# Altium PCB PCB_Project_1.PcbDoc
Units mil, origin at the board's own origin, x right, y up, seen from the top; angles counter-clockwise.
Board outline 6000 x 4000 mil, 2 copper layers (Top Layer, Bottom Layer); 5 components, 0 nets, 34 pads, 8 vias.
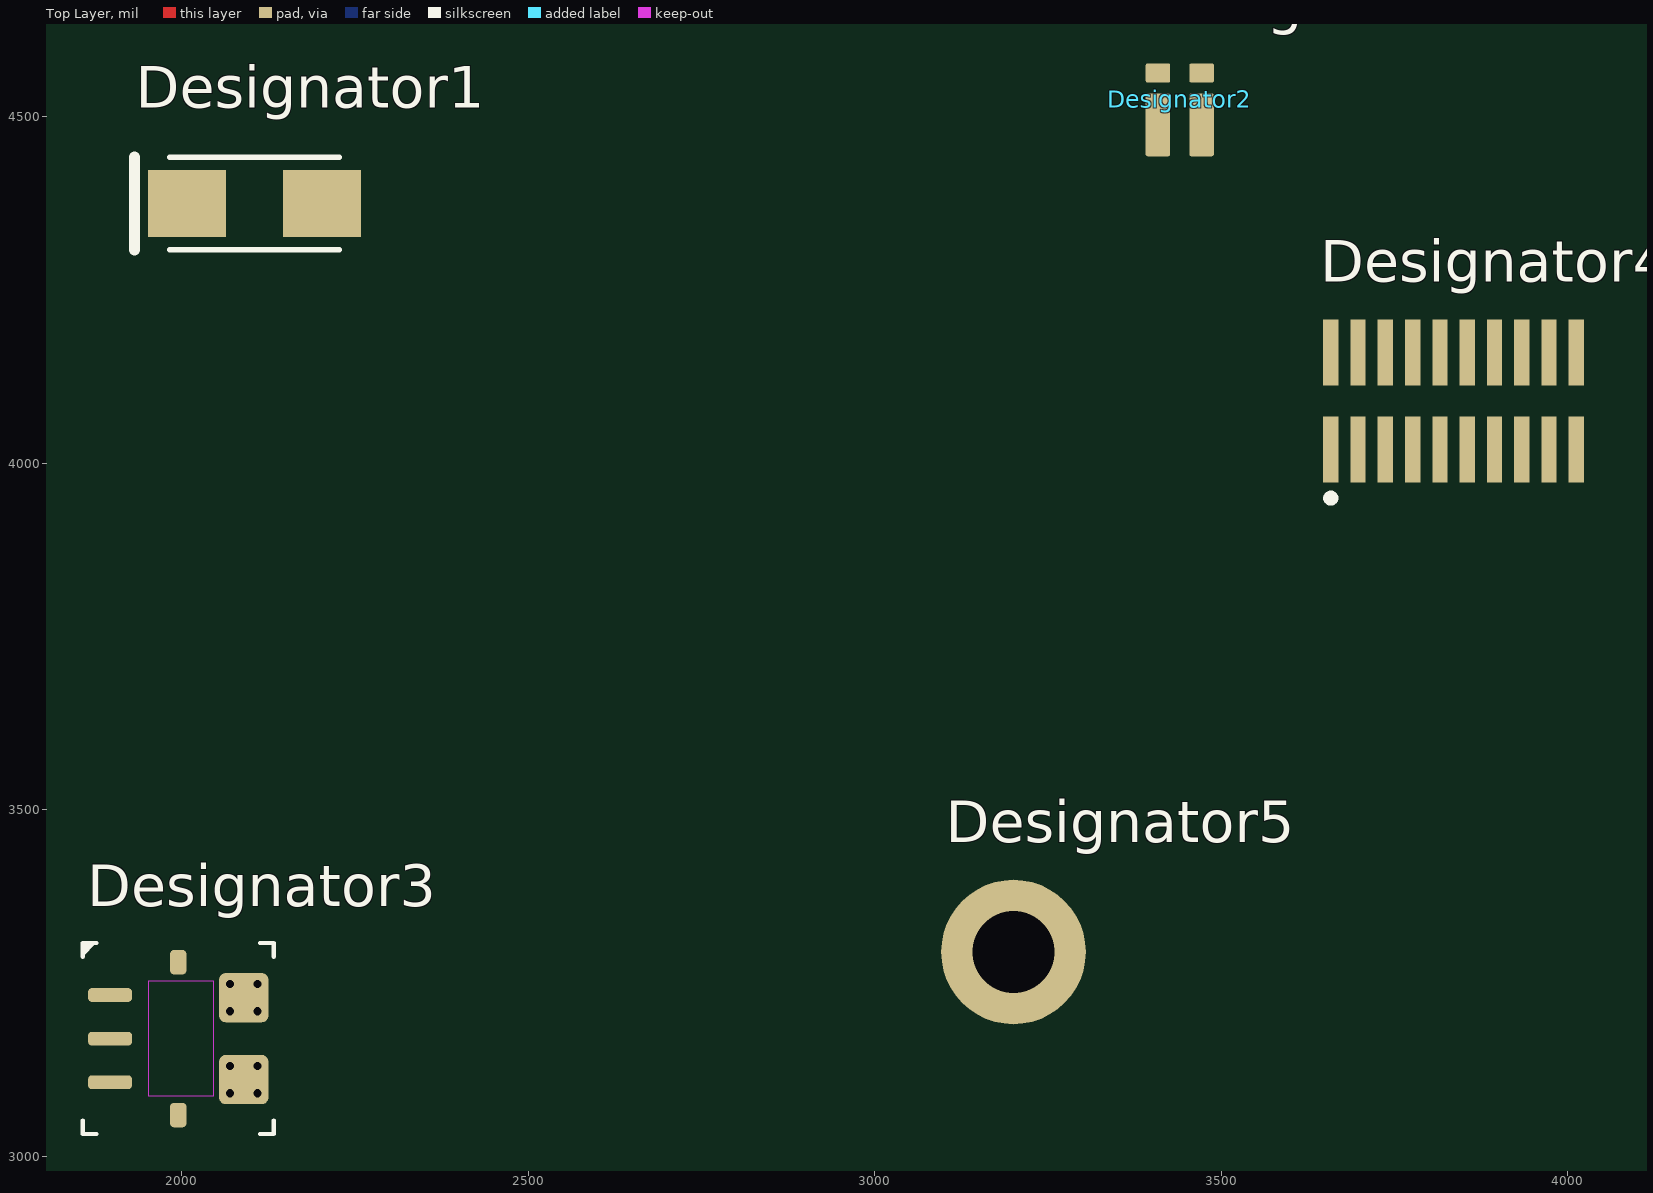
[diagram p0: Top Layer view]
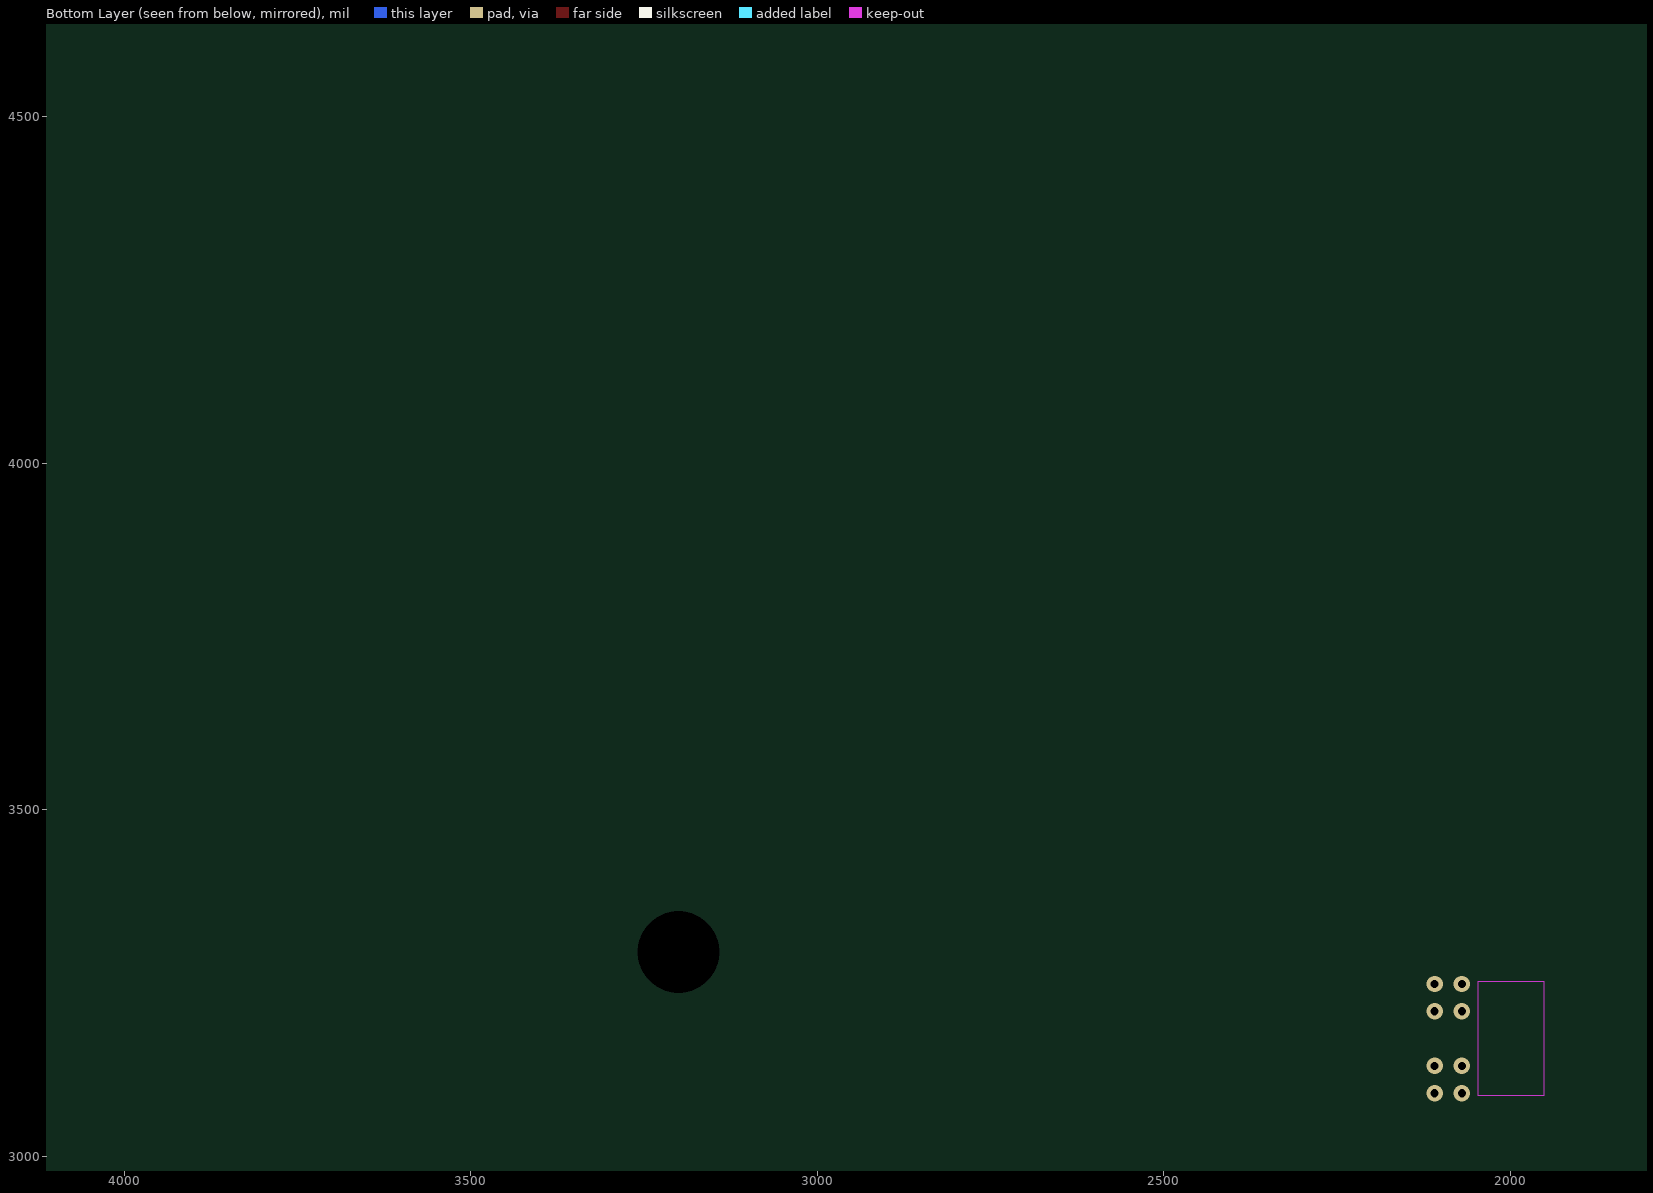
[diagram p1: Bottom Layer view, seen from below]

## Layer stack, top to bottom
Top Solder: solder mask 0.4, Solder Resist, Dk 3.5
Top Layer: signal copper 1.4
Dielectric 1: dielectric 12.6, FR-4, Dk 4.8
Bottom Layer: signal copper 1.4
Bottom Solder: solder mask 0.4, Solder Resist, Dk 3.5

## Board outline
1000,1000 7000,1000 7000,5000 1000,5000

## Design rules (kind name [scope] priority, off if disabled: settings)
Clearance [All] p1: gap=10 ignorepadtopadclearanceinfootprint=FALSE except(0: Arc-Hole Track-Hole SMDPad-Hole THPad-Hole Via-Hole Fill-Hole Poly-Hole Region-Hole Text-Hole)
PolygonConnect [All] p1: connectstyle=Relief reliefconductorwidth=10 reliefentries=4 polygonreliefangle="90 Angle" airgapwidth=10
RoutingVias [All] p1: holewidth=28 width=50 viastyle="Through Hole" minholewidth=28 minwidth=50 maxholewidth=28 maxwidth=50
SolderMaskExpansion [All] p1: expansion=4 istentingtop=FALSE
Width [All] p1: maxlimit=10 minlimit=10 preferedwidth=10
30 further rules are at their usual default settings.

## Components (designator, comment, footprint, x,y, rotation, side; value= is the part's Value field where it differs from the comment)
Designator1 "Comment" AVX-TAJ-C-2_M 2105,4375 r0 top
Designator2 "Comment" SUSUMU-3216T4A 3440,4510 r0 top
Designator3 "Comment" ALEG-PSOF-7_V 1995,3170 r0 top
Designator4 "Comment" SMTC-MW-10-03-G-D-245-065-P_V 3835,4090 r0 top
Designator5 "Comment" WE-9774040243_V 3200,3295 r0 top

## Footprints (in the part's own frame and the unit in brackets; to place one, negate y for a bottom-side part, rotate by r counter-clockwise, add the part's x,y. Pads: shape width x height; smd on the part's side, far side on the other; paste and mask are expansions set on the pad)
ALEG-PSOF-7_V [mm] "SOF, 8-Leads, Body 4.8x6.4mm"
  rrect50% 1.6x0.5 smd: 1(-2.5,1.6) 2(-2.5,0) 3(-2.5,-1.6)
  rrect50% 0.6x0.9 smd: 4(0,-2.8) 7(0,2.8)
  rrect25% 1.8x1.8 smd: 5(2.4,-1.5) 6(2.4,1.5)
  Keep-Out Layer region: -1.1,-2.1 1.3,-2.1 1.3,2.1 -1.1,2.1
  silkscreen extent -3.5,-3.5 3.5,3.5, body extent -3.2,-3.2 3.2,3.2, height 1.49
AVX-TAJ-C-2_M [mm] "Molded Capacitor, 2-Leads, Body 6.2x3.4mm, IPC Low Density"
  rect 2.85x2.45 smd: 1(-2.475,0) 2(2.475,0)
  silkscreen extent -4.4,-1.7 3.1,1.7, body extent -3.32,-1.7 3.32,1.7, height 2.8
SMTC-MW-10-03-G-D-245-065-P_V [mm] "CONN, 20-Leads, Body 3.18x10mm, Pitch 1mm"
  rect 0.56x2.41 smd: 1(-4.5,-1.78) 2(-4.5,1.78) 3(-3.5,-1.78) 4(-3.5,1.78) 5(-2.5,-1.78) 6(-2.5,1.78) 7(-1.5,-1.78) 8(-1.5,1.78) 9(-0.5,-1.78) 10(-0.5,1.78) 11(0.5,-1.78) 12(0.5,1.78) 13(1.5,-1.78) 14(1.5,1.78) 15(2.5,-1.78) 16(2.5,1.78) 17(3.5,-1.78) 18(3.5,1.78) 19(4.5,-1.78) 20(4.5,1.78)
  silkscreen extent -4.63,-3.69 -4.37,-3.44, body extent -5,-2.6 5,2.6, height 9.39
SUSUMU-3216T4A [mm] "SMD, 4-Leads, Body 3.2x1.6mm"
  rrect15% 0.9x2.3 smd: 1(-0.8,-0.55) 2(0.8,-0.55)
  rrect20% 0.9x0.7 smd: 3(-0.8,1.35) 4(0.8,1.35)
  body extent -0.8,-1.6 0.8,1.6, height 0.55
WE-9774040243_V [mm] "Round Standoff M2 Steel Spacer"
  round 5.3 / inner round 0 / far side round 0 hole 3: 1(0,0)
  body extent -2.17,-2.17 2.18,2.17, height 4

## Via types
v1: diameter 23.62, hole 11.81, Top Layer to Bottom Layer, 8 vias

## Nets (pads, with @x,y where several pads share a name; then routed paths per layer and width w, separated by ;. In a path a pad name is that pad's centre, name@x,y a point inside that pad or via, vN(x,y) a via of type N, cw(c..) or ccw(c..) an arc to the next point about the centre after c; other vN are vias at no path point)
pads on no net: Designator1.1 Designator1.2 Designator2.1 Designator2.2 Designator2.3 Designator2.4 Designator3.1 Designator3.2 Designator3.3 Designator3.4 Designator3.5 Designator3.6 Designator3.7 Designator4.1 Designator4.2 Designator4.3 Designator4.4 Designator4.5 Designator4.6 Designator4.7 Designator4.8 Designator4.9 Designator4.10 Designator4.11 Designator4.12 Designator4.13 Designator4.14 Designator4.15 Designator4.16 Designator4.17 Designator4.18 Designator4.19 Designator4.20 Designator5.1
copper on no net:
  other v1: 2069.8,3091.26 2109.17,3091.26 2069.8,3130.63 2109.17,3130.63 2069.8,3209.37 2109.17,3209.37 2069.8,3248.74 2109.17,3248.74